# Altium PCB TB Teensy pcb.PcbDoc
Units mm, origin at the board's own origin, x right, y up, seen from the top; angles counter-clockwise.
Board outline 45.9 x 99.6 mm, 2 copper layers (Top Layer, Bottom Layer); 22 components, 49 nets, 158 pads, 97 vias.
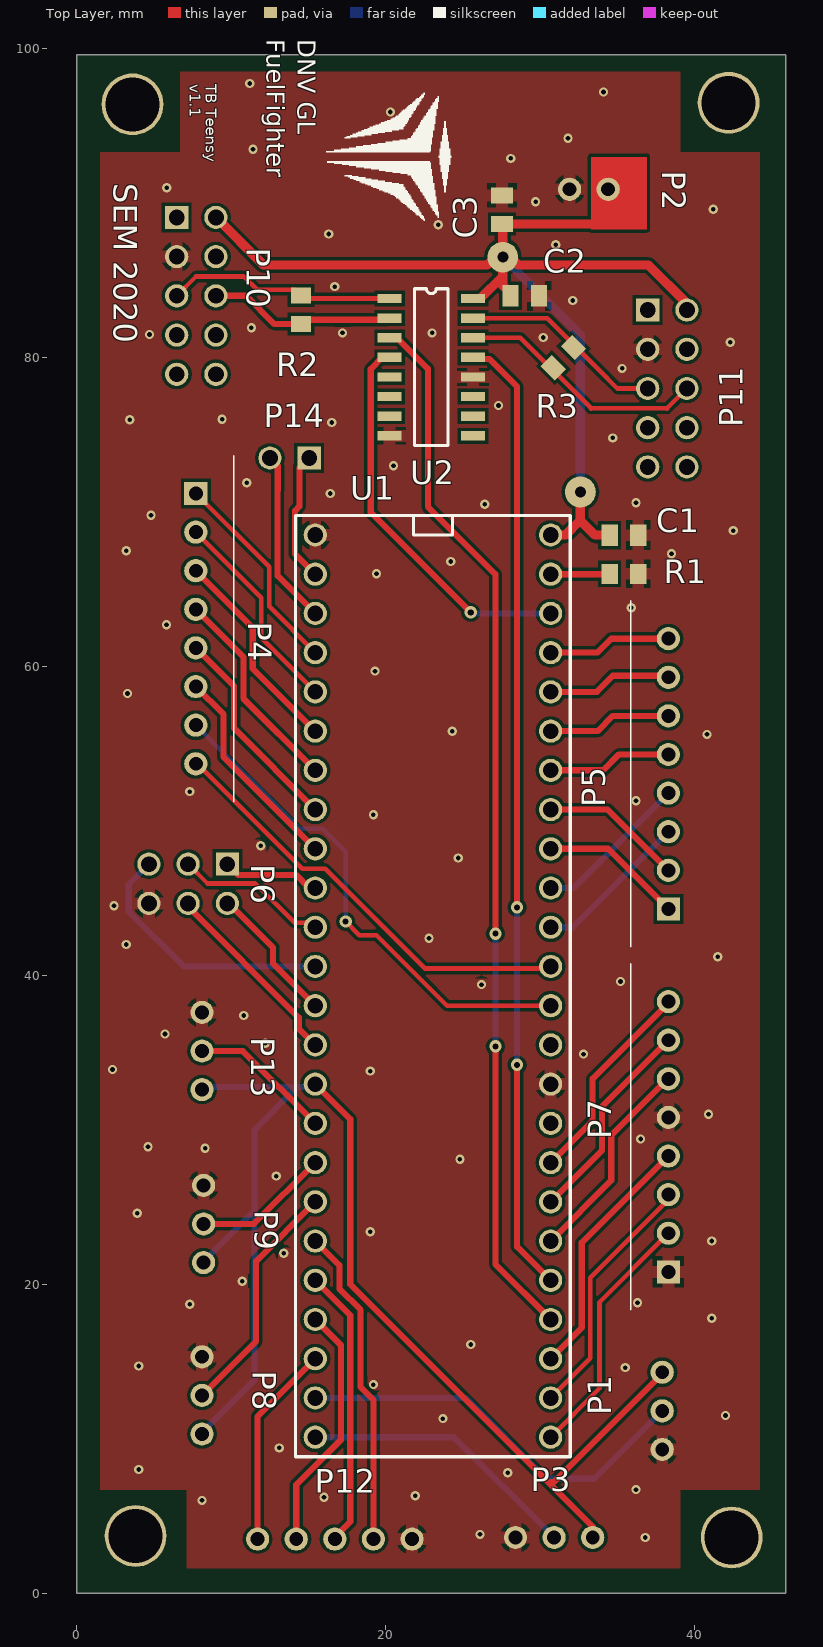
[diagram p0: Top Layer view]
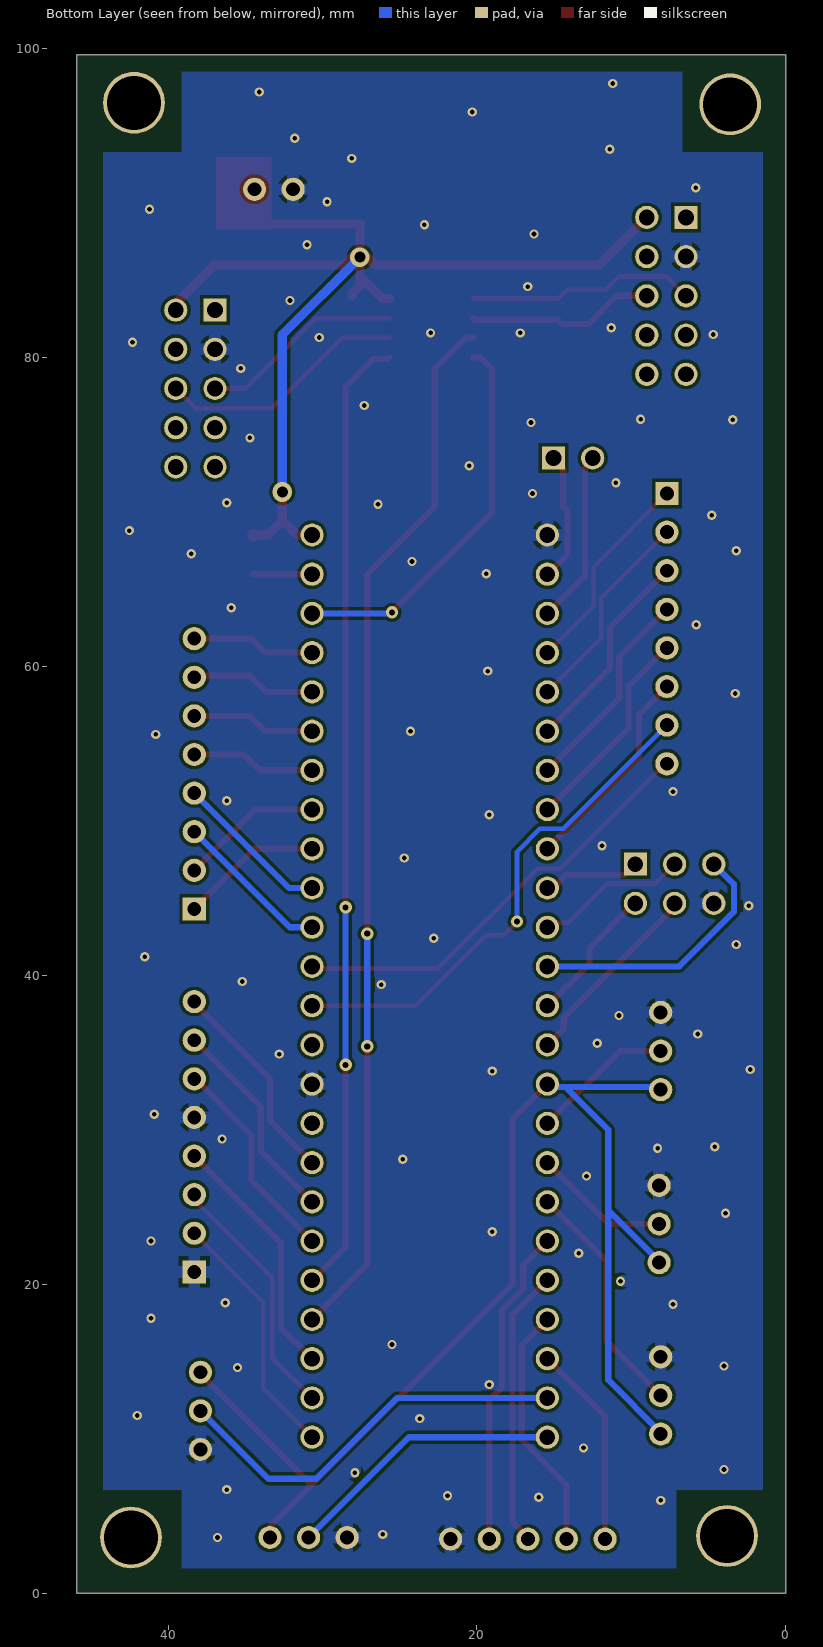
[diagram p1: Bottom Layer view, seen from below]

## Layer stack, top to bottom
Top Solder: solder mask 0.0102, Solder Resist, Dk 3.5
Top Layer: signal copper 0.0356
Dielectric 1: dielectric 0.32, FR-4, Dk 4.8
Bottom Layer: signal copper 0.0356
Bottom Solder: solder mask 0.0102, Solder Resist, Dk 3.5

## Board outline
0,0 45.9,0 45.9,99.6 0,99.6

## Design rules (kind name [scope] priority, off if disabled: settings)
Clearance [All] p1: gap=0.203 ignorepadtopadclearanceinfootprint=FALSE except(0: Arc-Hole Track-Hole SMDPad-Hole THPad-Hole Via-Hole Fill-Hole Poly-Hole Region-Hole Text-Text Text-Hole)
HoleSize [All] p1: absolutevalues=TRUE maxlimit=5 minlimit=0.025 maxpercent=80.000 minpercent=20.000
PlaneConnect [All] p1: planeconnectstyle=Relief reliefexpansion=0.508 reliefentries=4 reliefconductorwidth=0.5 reliefairgap=0.254
PolygonConnect [All] p1: connectstyle=Relief reliefconductorwidth=0.8 reliefentries=4 polygonreliefangle="90 Angle" airgapwidth=0.254
RoomDefinition "TB Teensy pcb" [InComponentClass('TB Teensy pcb')] p1: confinementstyle=ConfineIn formatcopy=TRUE lockcomponents=FALSE outline -7.6,-10.3 51.7,-10.3 51.7,104.7 -7.6,104.7
RoutingVias [All] p1: holewidth=0.711 width=1.27 viastyle="Through Hole" minholewidth=0.3 minwidth=0 maxholewidth=0.711 maxwidth=1.27
SilkToSilkClearance [All] p1: silktosilkclearance=0.1
SolderMaskExpansion [All] p1: expansion=0.102 istentingtop=FALSE
Width [All] p1: maxlimit=2 minlimit=0.203 preferedwidth=0.4 minimp=50.000000 maximp=50.000000 favimp=50.000000
27 further rules are at their usual default settings.

## Components (designator, comment, footprint, x,y, rotation, side; value= is the part's Value field where it differs from the comment)
C1 "SMD" C_SMD_0805_pcb 35.425,68.5 r0 top value="0.1 uF"
C2 "SMD" C_SMD_0805_pcb 29,84 r0 top value="0.1 uF"
C3 "SMD" C_SMD_0805_pcb 27.525,89.575 r270 top value="0.1 uF"
P1 "JST_SE_3PIN" JST_SE_3PIN 41.3,6.9 r90 top
P2 "JST_SE_2PIN" JST_SE_2PIN 34.4,90.9 r180 top
P3 "JST_SE_3PIN" JST_SE_3PIN 26,0.2 r0 top
P4 "JST_SE_8PIN" JST_SE_8PIN 7.7,71.2 r270 top
P5 "JST_SE_8PIN" JST_SE_8PIN 38.3,44.3 r90 top
P6 "M_2x3" PIN_HEADER_M_2x3 4.66,44.66 r0 top
P7 "JST_SE_8PIN" JST_SE_8PIN 38.3,20.8 r90 top
P8 "JST_SE_3PIN" JST_SE_3PIN 4.7,17.7 r270 top
P9 "JST_SE_3PIN" JST_SE_3PIN 4.8,28.8 r270 top
P10 "M_2x5" PIN_HEADER_M_2x5 9,78.92 r90 top
P11 "M_2x5" PIN_HEADER_M_2x5 39.5,72.92 r90 top
P12 "JST_SE_5PIN" JST_SE_5PIN 21.7,3.5 r0 top
P13 "JST_SE_3PIN" JST_SE_3PIN 4.7,40 r270 top
P14 "M_1x2" PIN_HEADER_M_1x2 12.5,73.5 r0 top
R1 "SMD" R_SMD_0805_pcb 35.425,66 r0 top value="1 Ohm 1/4W"
R2 "SMD" R_SMD_0805_pcb 14.5,83.1 r90 top value="100 Ohm 1/8W"
R3 "SMD" R_SMD_0805_pcb 31.5,80 r45 top value="100 Ohm 1/8W"
U1 "teensy_3.6" teensy_3.6 14.8,70.42 r0 top
U2 "AM26LS32ACDR" AM26LS32ACDR 20.25,83.825 r0 top

## Footprints (in the part's own frame and the unit in brackets; to place one, negate y for a bottom-side part, rotate by r counter-clockwise, add the part's x,y. Pads: shape width x height; smd on the part's side, far side on the other; paste and mask are expansions set on the pad)
AM26LS32ACDR [mm]
  rect 1.55x0.6 smd: 1(0,0) 2(0,-1.27) 3(0,-2.54) 4(0,-3.81) 5(0,-5.08) 6(0,-6.35) 7(0,-7.62) 8(0,-8.89) 9(5.4,-8.89) 10(5.4,-7.62) 11(5.4,-6.35) 12(5.4,-5.08) 13(5.4,-3.81) 14(5.4,-2.54) 15(5.4,-1.27) 16(5.4,0)
  silkscreen extent 1.61,-9.53 3.79,0.64, body extent -0.3,-9.8 5.7,0.5, height 1.55
C_SMD_0805_pcb [mm] "Chip Capacitor, 2-Leads, Body 2,00x1,25mm, IPC Medium Density"
  rect 1.05x1.4 smd: 1(-0.925,0) 2(0.925,0)
  body extent -1,-0.63 1,0.62, height 1.35
JST_SE_2PIN [mm]
  round 1.5 hole 0.9: 1(0,0) 2(2.5,0)
  body extent -2.45,-9.2 4.95,2.3, height 6.1
JST_SE_3PIN [mm]
  round 1.5 hole 0.9: 1(7.4,3.4) 2(4.9,3.4) 3(2.4,3.4)
  body extent -0.05,-5.8 9.85,5.7, height 6.1
JST_SE_5PIN [mm] "for side PCB"
  round 1.5 hole 0.9: 1(0,0) 2(-2.5,0) 3(-5,0) 4(-7.5,0) 5(-10,0)
  body extent -12.45,-9.2 2.45,2.3, height 6.1
JST_SE_8PIN [mm]
  rect 1.5x1.5 hole 0.9: 1(0,0)
  round 1.5 hole 0.9: 2(2.5,0) 3(5,0) 4(7.5,0) 5(10,0) 6(12.5,0) 7(15,0) 8(17.5,0)
  silkscreen extent -2.45,2.45 19.95,2.45, body extent -2.45,-9.2 19.95,2.3, height 8.1
PIN_HEADER_M_1x2 [mm]
  rect 1.5x1.5 hole 1.02: 1(2.54,0)
  round 1.5 hole 1.02: 2(0,0)
  body extent -1.27,-1.27 3.81,1.27, height 8.34
PIN_HEADER_M_2x3 [mm]
  rect 1.5x1.5 hole 1.02: 1(5.08,2.54)
  round 1.5 hole 1.02: 2(2.54,2.54) 3(0,2.54) 4(0,0) 5(2.54,0) 6(5.08,0)
  body extent -1.27,-1.27 6.35,3.81, height 8.34
PIN_HEADER_M_2x5 [mm]
  rect 1.5x1.5 hole 1.02: 1(10.16,2.54)
  round 1.5 hole 1.02: 2(7.62,2.54) 3(5.08,2.54) 4(2.54,2.54) 5(0,2.54) 6(0,0) 7(2.54,0) 8(5.08,0) 9(7.62,0) 10(10.16,0)
  body extent -1.27,-1.27 11.43,3.81, height 8.34
R_SMD_0805_pcb [mm]
  rect 1.05x1.3 smd: 1(-0.925,0) 2(0.925,0)
  body extent -1,-0.6 1,0.6, height 0.65
teensy_3.6 [mm]
  round 1.5 hole 1.016: 0(0.635,-4.445) 1(0.635,-6.985) 2(0.635,-9.525) 3(0.635,-12.065) 4(0.635,-14.605) 5(0.635,-17.145) 6(0.635,-19.685) 7(0.635,-22.225) 8(0.635,-24.765) 9(0.635,-27.305) 10(0.635,-29.845) 11(0.635,-32.385) 12(0.635,-34.925) 13(15.875,-34.925) 14(15.875,-32.385) 15(15.875,-29.845) 16(15.875,-27.305) 17(15.875,-24.765) 18(15.875,-22.225) 19(15.875,-19.685) 20(15.875,-17.145) 21(15.875,-14.605) 22(15.875,-12.065) 23(15.875,-9.525) 24(0.635,-40.005) 25(0.635,-42.545) 26(0.635,-45.085) 27(0.635,-47.625) 28(0.635,-50.165) 29(0.635,-52.705) 30(0.635,-55.245) 31(0.635,-57.785) 32(0.635,-60.325) 33(15.875,-60.325) 34(15.875,-57.785) 35(15.875,-55.245) 36(15.875,-52.705) 37(15.875,-50.165) 38(15.875,-47.625) 39(15.875,-45.085) +3V3(0.635,-37.465) +3V3(15.875,-6.985) A21(15.875,-42.545) A22(15.875,-40.005) AGND(15.875,-4.445) GND(0.635,-1.905) GND(15.875,-37.465) VIN(15.875,-1.905)
  silkscreen extent -0.64,-61.59 17.14,-0.64, body extent -0.62,-61.66 17.16,0.7, height 7.49

## Part data
C1 C2 C3: library part C_SMD_0805
P6: library part PIN_HEADER_M_2x3
P10 P11: library part PIN_HEADER_M_2x5
P14: library part PIN_HEADER_M_1x2
R1 R2 R3: library part R_SMD_0805
U2: "IC QUAD DIFF LINE RCVR 16-SOIC", Case/Package=D, Current Rating=8A, Manufacturer 1="Texas Instruments", Max Operating Temperature=70°C, Max Supply Current=70mA, Max Supply Voltage=5.25V, Min Operating Temperature=0°C, Min Supply Voltage=4.75V, Operating Supply Voltage=5V, Package Quantity=1, Supplier Part Number 1=296-1011-1-ND, ComponentLink1Description=https://datasheet.ciiva.com/3028/slls115e-3028016.pdf?src-supplier=Avnet, ComponentLink1URL=https://datasheet.ciiva.com/3028/slls115e-3028016.pdf?src-supplier=Avnet, ComponentLink2Description=https://datasheet.ciiva.com/1156/am26ls33a-1156901.pdf?src-supplier=Newark, ComponentLink2URL=https://datasheet.ciiva.com/1156/am26ls33a-1156901.pdf?src-supplier=Newark, ComponentLink3Description=https://datasheet.ciiva.com/26831/am26ls32acdr-26831645.pdf?src-supplier=IIIC, ComponentLink3URL=https://datasheet.ciiva.com/26831/am26ls32acdr-26831645.pdf?src-supplier=IIIC, ComponentLink4Description=https://datasheet.ciiva.com/1700/am26ls32a-1700817.pdf?src-supplier=Digi-Key, ComponentLink4URL=https://datasheet.ciiva.com/1700/am26ls32a-1700817.pdf?src-supplier=Digi-Key, ComponentLink5Description=https://datasheet.ciiva.com/1700/am26ls32a-1700818.pdf?src-supplier=Digi-Key, ComponentLink5URL=https://datasheet.ciiva.com/1700/am26ls32a-1700818.pdf?src-supplier=Digi-Key, ComponentLink6Description=https://datasheet.ciiva.com/3028/am26ls32a-3028146.pdf?src-supplier=Avnet, ComponentLink6URL=https://datasheet.ciiva.com/3028/am26ls32a-3028146.pdf?src-supplier=Avnet, ComponentLink7Description=https://datasheet.ciiva.com/1700/am26ls32a-1700819.pdf?src-supplier=Digi-Key, ComponentLink7URL=https://datasheet.ciiva.com/1700/am26ls32a-1700819.pdf?src-supplier=Digi-Key, ComponentLink8Description=https://datasheet.ciiva.com/26240/am26ls32a-26240838.pdf?src-supplier=Avnet+Europe, ComponentLink8URL=https://datasheet.ciiva.com/26240/am26ls32a-26240838.pdf?src-supplier=Avnet+Europe, ComponentLink9Description=https://datasheet.ciiva.com/46396/1862380-46396475.pdf?src-supplier=Element14, ComponentLink9URL=https://datasheet.ciiva.com/46396/1862380-46396475.pdf?src-supplier=Element14, ComponentLink10Description=https://datasheet.ciiva.com/8064/1862380-8064734.pdf?src-supplier=Element14, ComponentLink10URL=https://datasheet.ciiva.com/8064/1862380-8064734.pdf?src-supplier=Element14, ComponentLink11Description=https://datasheet.ciiva.com/48709/001047720-da-01-en-ic-4x-dff-ln-rc-am26ls32acdr-soic-16-tid-48709254.pdf?src-supplier=Conrad, ComponentLink11URL=https://datasheet.ciiva.com/48709/001047720-da-01-en-ic-4x-dff-ln-rc-am26ls32acdr-soic-16-tid-48709254.pdf?src-supplier=Conrad, Contact Plating=Gold, Data Rate=10Mbps, ESD Protection=No, Height=1.58mm, Lead Free="Lead Free", Length=9.9mm, Logic Function=Receiver, Manufacturer Part Number 1=AM26LS32ACDR, Nominal Supply Current=70mA, Number of Drivers=4, Number of Pins=16, Number of Receivers=4, Operating Supply Current=70mA, Packaging="Tape and Reel", Pricing 1="1=0,66000, 10=0,57800, 25=0,54280, 100=0,41150, 250=0,35020, 500=0,33270, 1000=0,25390 (USD)", Radiation Hardening=No, REACH SVHC="No SVHC", RoHS=Yes, Stock 1=24922, Supplier 1=Digi-Key, Weight=0.004998oz, Width=3.91mm
P4 P5 P7: Category="Pin Header"

## Free pads (board coordinates)
  round 4 hole 3.5: ""(3.6,96.4) ""(3.8,3.7) ""(42.2,96.5) ""(42.4,3.6)
  round 1 on Top Overlay: ""(4.794,77.978) ""(35.147,77.978)
  round 2 smd: ""(27.575,86.5) ""(32.6,71.3)

## Via types
v1: diameter 0.6, hole 0.3, Top Layer to Bottom Layer, tented both sides, 89 vias
v2: diameter 0.8, hole 0.4, Top Layer to Bottom Layer, 6 vias
v3: diameter 1.27, hole 0.711, Top Layer to Bottom Layer, 2 vias

## Nets (pads, with @x,y where several pads share a name; then routed paths per layer and width w, separated by ;. In a path a pad name is that pad's centre, name@x,y a point inside that pad or via, vN(x,y) a via of type N, cw(c..) or ccw(c..) an arc to the next point about the centre after c; other vN are vias at no path point)
+3.3V: P1.1 P3.1 P8.1 P9.1 P13.1 U1.+3V3 U2.4 | length 109.9
  Top Layer w0.4: U1.+3V3@15.435,32.955 17.7,30.69 17.7,20 33.4,4.3 P3.1 P3.1@33.4,3.5 ; U2.4 19.775,80.015 19.021,79.261 19.021,69.979 v2(25.5,63.5) ; 30.6,7.191 30.891,7.191 P1.1@38,14.3
  Bottom Layer w0.4: P8.1@8,10.3 11.5,13.8 11.5,24.8 ; P13.1@8,32.6 8.177,32.778 14.278,32.778 ; P9.1@8.1,21.4 11.5,24.8 ; U1.+3V3@15.435,32.955 15.258,32.778 14.278,32.778 ; v2(25.5,63.5) 25.565,63.435 U1.+3V3@30.675,63.435 ; 11.5,24.8 11.5,30 14.278,32.778
+5V: C1.1 C2.1 C3.2 P2.1 P10.10 P11.10 pad.@27.575,86.5 pad.@32.6,71.3 U1.VIN U2.16 | length 72.9
  Top Layer w0.6: P10.10 12.08,86 17.7,86 26.575,86 pad.@27.575,87 ; U2.16 26.125,83.825 27.575,85.275 ; C3.2 34.15,88.65 35.1,89.6 ; C3.2@27.575,88.4 pad.@27.575,87 ; C2.1 28.075,84.175 27.575,84.675 27.575,85.275 ; U1.VIN@30.683,68.507 31.635,68.507 32.6,69.472 ; v3(32.6,71.3) 32.6,69.472 ; C1.1@34.493,68.507 33.54,68.507 32.6,69.448 32.6,69.472 ; P11.10 39.5,83.5 37,86 28.575,86 pad.@27.575,87 ; 27.575,85.275 v3(27.575,86.5) pad.@27.575,87
  Top Layer w0.8: U1.VIN U1.VIN@30.683,68.507 ; C1.1@34.493,68.507 C1.1
  Bottom Layer w0.6: v3(27.575,86.5) 32.6,81.475 v3(32.6,71.3)
A_1: P11.8 R3.1 U2.14 | length 16.3
  Top Layer w0.3: U2.14 28.715,81.285 33.292,76.708 33.297,76.713 38.203,76.713 38.208,76.708 P11.8
A_2: P10.8 R2.1 U2.2 | length 12.2
  Top Layer w0.4: P10.8 10.964,84 12.789,82.175 R2.1 14.78,82.455 20.15,82.455 U2.2
A~_1: P11.3 R3.2 U2.15 | length 13.2
  Top Layer w0.3: U2.15 30.445,82.555 33.75,79.25 35,78 P11.3
A~_2: P10.3 R2.2 U2.1 | length 14.9
  Top Layer w0.3: P10.3 7.713,85.253 10.814,85.253 11.667,84.4 14.125,84.4 R2.2 14.7,83.825 U2.1
GND: C1.2 C2.2 C3.1 P1.3 P2.2 P3.3 P6.4 P7.1 P7.5 P8.3 P9.3 P10.2 P11.2 P12.1 P13.3 R1.2 U1.GND U2.8 U2.12
  other v1: 36.8,3.6 26.1,3.8 8.1,6 16,6.2 21.9,6.3 36.2,6.7 27.9,7.8 4,8 13.1,9.4 23.7,11.3 42,11.5 19.2,13.5 35.5,14.6 4,14.7 25.5,16.1 41.1,17.8 7.3,18.7 36.3,18.8 10.7,20.2 13.4,22 41.1,22.8 19,23.4 3.9,24.6 12.9,27 24.8,28.1 8.3,28.8 4.6,28.9 36.5,29.4 40.9,31 19,33.8 2.3,33.9 32.8,34.9 12.2,35.6 5.7,36.2 10.8,37.4 26.2,39.4 35.2,39.6 41.5,41.2 3.2,42 22.8,42.4 2.4,44.5 24.7,47.6 11.9,48.4 19.2,50.4 36.2,51.3 7.3,51.9 40.8,55.6 24.3,55.8 3.275,58.25 19.3,59.7 5.8,62.7 35.9,63.8 19.4,66 24.2,66.8 38.5,67.3 3.2,67.5 42.5,68.8 4.8,69.8 26.4,70.5 36.2,70.6 16.4,71.2 11,71.9 20.5,73 34.7,74.8 16.5,75.8 3.425,75.975 9.4,76 27.3,76.9 35.3,79.3 42.3,81 30.2,81.3 4.7,81.5 17.2,81.6 23,81.6 11.3,81.925 32.1,83.7 16.7,84.6 31,87.3 16.3,88 23.4,88.6 41.2,89.6 29.7,90.1 5.825,91 28.1,92.9 11.4,93.5 31.8,94.2 20.3,95.9 34.1,97.2 11.198,97.752
NetP1_2: P1.2 U1.31 | length 26.5
  Bottom Layer w0.4: U1.31 25.165,12.635 30.4,7.4 33.5,7.4 P1.2
NetP3_2: P3.2 U1.32 | length 18.2
  Bottom Layer w0.4: U1.32 24.405,10.095 P3.2
NetP4_1: P4.1 U1.2 | length 13.5
  Top Layer w0.3: P4.1 12.444,66.456 12.444,63.886 U1.2
NetP4_2: P4.2 U1.3 | length 13.5
  Top Layer w0.3: P4.2 11.94,64.46 11.94,61.85 U1.3
NetP4_3: P4.3 U1.4 | length 13.6
  Top Layer w0.4: P4.3 11.387,62.513 11.387,59.863 U1.4
NetP4_4: P4.4 U1.5 | length 13.6
  Top Layer w0.4: P4.4 10.784,60.616 10.784,57.926 U1.5
NetP4_5: P4.5 U1.6 | length 13.7
  Top Layer w0.4: P4.5 10.181,58.719 10.181,55.989 U1.6
NetP4_6: P4.6 U1.7 | length 13.7
  Top Layer w0.4: P4.6 9.5,56.9 9.5,54.13 U1.7
NetP4_7: P4.7 U1.14 | length 33.1
  Top Layer w0.3: v2(17.4,43.485) 18.285,42.6 19.4,42.6 23.965,38.035 U1.14
  Bottom Layer w0.3: P4.7 14.418,49.482 15.92,49.482 17.4,48.002 v2(17.4,43.485)
NetP4_8: P4.8 U1.15 | length 28.5
  Top Layer w0.3: P4.8 7.8,53.7 14.592,46.908 16.068,46.908 22.529,40.447 30.547,40.447 U1.15
NetP5_1: P5.1 U1.18 | length 9.2
  Top Layer w0.4: U1.18 34.405,48.195 P5.1
NetP5_2: P5.2 U1.19 | length 9.3
  Top Layer w0.4: U1.19 34.365,50.735 P5.2
NetP5_3: P5.3 U1.16 | length 10.2
  Bottom Layer w0.4: U1.16 32.115,43.115 P5.3
NetP5_4: P5.4 U1.17 | length 10.3
  Top Layer w0.4: U1.17 U1.17@30.773,45.752
  Bottom Layer w0.4: U1.17 32.155,45.655 P5.4
NetP5_5: P5.5 U1.20 | length 8
  Top Layer w0.4: U1.20 34.075,53.275 35.1,54.3 P5.5
NetP5_6: P5.6 U1.21 | length 8
  Top Layer w0.4: U1.21 33.715,55.815 34.7,56.8 P5.6
NetP5_7: P5.7 U1.22 | length 8.1
  Top Layer w0.4: U1.22 33.655,58.355 34.7,59.4 38.2,59.4 P5.7
NetP5_8: P5.8 U1.23 | length 8
  Top Layer w0.4: U1.23 33.695,60.895 34.6,61.8 P5.8
NetP6_1: P6.1 U1.8 | length 6.3
  Top Layer w0.4: P6.1 10.44,46.5 14.211,46.5 15.056,45.655 U1.8
NetP6_2: P6.2 U1.9 | length 9.9
  Top Layer w0.3: P6.2 8.453,45.947 11.553,45.947 14.098,43.402 15.148,43.402 U1.9
NetP6_3: P6.3 U1.10 | length 17.2
  Bottom Layer w0.4: P6.3 3.357,45.897 3.357,44.12 6.902,40.575 U1.10
NetP6_5: P6.5 U1.12 | length 12.6
  Top Layer w0.4: P6.5 7.2,44.427 14.374,37.253 14.374,36.556 U1.12
NetP6_6: P6.6 U1.11 | length 9
  Top Layer w0.4: P6.6 9.834,44.66 12.706,41.789 12.706,40.764 U1.11
NetP7_2: P7.2 U1.33 | length 16.4
  Top Layer w0.3: U1.33 33.84,13.26 33.84,18.84 P7.2
NetP7_3: P7.3 U1.34 | length 16.3
  Top Layer w0.3: U1.34 33.247,15.207 33.247,20.423 38.3,25.476 P7.3
NetP7_4: P7.4 U1.35 | length 16.3
  Top Layer w0.4: U1.35 32.694,17.194 32.694,22.694 P7.4
NetP7_6: P7.6 U1.38 | length 13.7
  Top Layer w0.4: U1.38 34.6,26.72 34.6,29.653 38.247,33.3 P7.6
NetP7_7: P7.7 U1.39 | length 13.6
  Top Layer w0.4: U1.39 33.997,28.657 33.997,31.497 P7.7
NetP7_8: P7.8 U1.A21 | length 13.6
  Top Layer w0.4: U1.A21 33.394,30.594 33.394,33.299 38.3,38.206 P7.8
NetP8_2: P8.2 U1.26 | length 15.6
  Top Layer w0.4: P8.2 11.6,16.3 11.6,21.5 U1.26
NetP9_2: P9.2 U1.25 | length 8.9
  Top Layer w0.4: P9.2 11.46,23.9 U1.25
NetP12_2: P12.2 U1.27 | length 20.9
  Top Layer w0.4: U1.27 17,21.23 17,19.7 18.366,18.334 18.366,13.339 19.2,12.506 P12.2
NetP12_3: P12.3 U1.28 | length 18.1
  Top Layer w0.4: U1.28 17.703,17.987 17.703,4.618 16.7,3.615 P12.3
NetP12_4: P12.4 U1.29 | length 16.1
  Top Layer w0.4: P12.4 14.2,7.017 17.1,9.917 17.1,16.05 U1.29
NetP12_5: P12.5 U1.30 | length 13.2
  Top Layer w0.4: P12.5 11.7,11.44 U1.30
NetP13_2: P13.2 U1.24 | length 9.3
  Top Layer w0.4: P13.2 10.75,35.1 U1.24
NetP14_1: P14.1 U1.0 | length 8.4
  Top Layer w0.4: P14.1 14.403,72.863 14.403,70.364 14.132,70.093 14.132,67.278 U1.0
NetP14_2: P14.2 U1.1 | length 11.3
  Top Layer w0.4: P14.2 13,73 13,71.394 12.997,71.391 12.997,65.873 U1.1
NetR1_2: R1.1 U1.AGND | length 3.8
  Top Layer w0.4: U1.AGND 34.475,65.975 R1.1
NetU1_36: U1.36 U2.3 | length 68.2
  Top Layer w0.4: U2.3 20.725,81.285 22.725,79.285 22.725,70.35 27.1,65.975 v2(27.1,42.7) ; v2(27.1,35.4) 27.1,21.29 U1.36
  Bottom Layer w0.4: v2(27.1,35.4) v2(27.1,42.7)
NetU1_37: U1.37 U2.13 | length 62.4
  Top Layer w0.4: U2.13 25.75,79.915 26.71,79.915 28.5,78.125 v2(28.5,44.4) ; v2(28.5,34.2) 28.5,22.43 U1.37
  Bottom Layer w0.4: v2(28.5,34.2) v2(28.5,44.4)
NetU1_A22: U1.A22
pads on no net: P10.1 P10.4 P10.5 P10.6 P10.7 P10.9 P11.1 P11.4 P11.5 P11.6 P11.7 P11.9 U1.13 U2.5 U2.6 U2.7 U2.9 U2.10 U2.11

## Polygon pours and split planes (outlines as drawn)
GND on Top Layer "Top Layer-GND" (solid, pour order 2): 6.7,98.5 6.7,93.3 1.5,93.3 1.5,6.7 7.1,6.7 7.1,1.6 39.075,1.6 39.075,6.7 44.2,6.7 44.2,93.3 39.075,93.3 39.075,98.5
GND on Bottom Layer "Bottom Layer-GND" (solid, pour order 4): 6.7,98.5 6.7,93.3 1.5,93.3 1.5,6.7 7.1,6.7 7.1,1.6 39.1,1.6 39.1,6.7 44.2,6.7 44.2,93.3 39.1,93.3 39.1,98.5

## Other copper
Top Layer:
  rectangle net +5V: 33.3,88.3 36.9,93

## Silkscreen, mask and mechanical layers (free items; w line width, h text height)
Top Overlay:
  drawing of 5 lines, arcs and shapes, not listed
  text "DNV GL / FuelFighter" at 11.9,100.6 h2 r270
  text "TB Teensy / v1.1" at 7.3,97.7 h0.7 r270
  text "SEM 2020" at 2.4,91.3 h1.52 r270
Mechanical 1:
  lines w0.254: 0.25,0.35 0.3,0.3 45.7,0.3 45.7,99.375 45.725,99.4 0.25,99.4 0.25,0.35